# Altium PCB L_radar_some_PCBs.PcbDoc (part 2 of 3)
Units mm, origin at the board's own origin, x right, y up, seen from the top; angles counter-clockwise.
Board outline 152.4 x 101.6 mm, 8 copper layers (Top Layer, Layer 5, Layer 3, Layer 1, Layer 2, Layer 4, Layer 6, Bottom Layer), stack 1.028 mm thick; 12 components, 0 nets, 0 pads, 2735 vias.
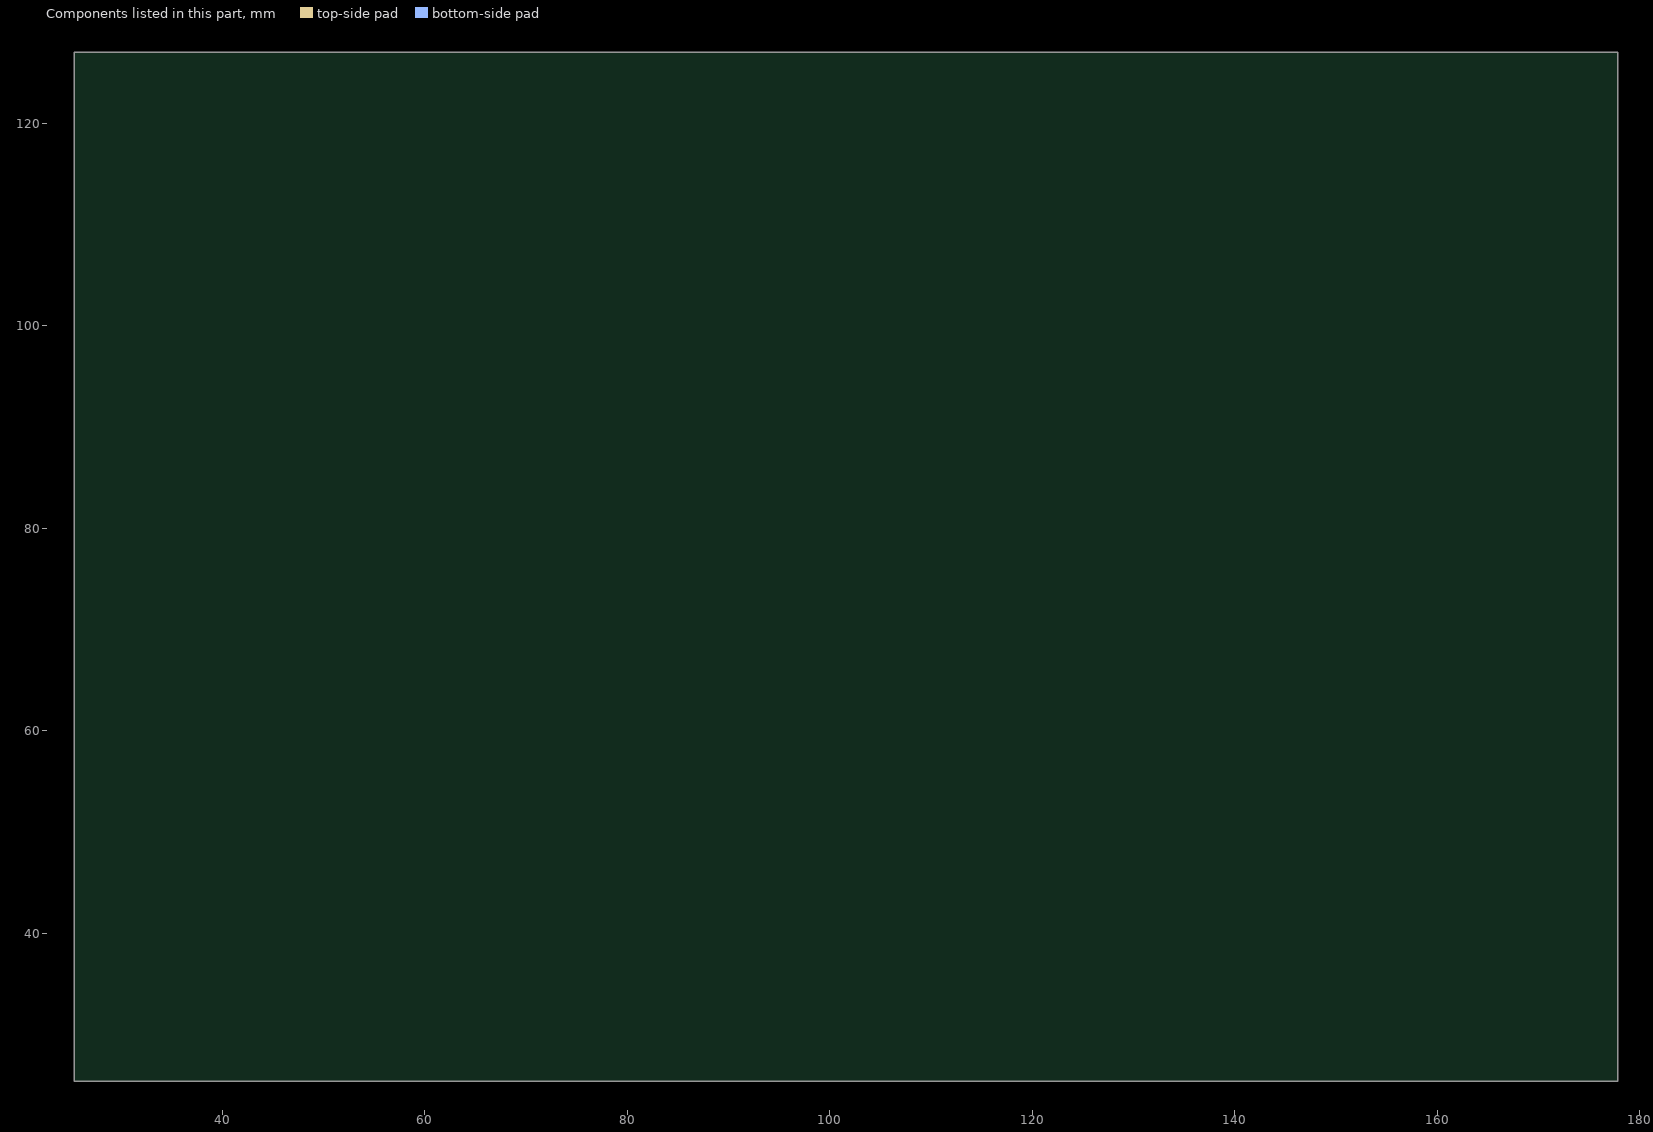
[diagram p8: the components of this part, seen from the top]

## Via types
v1: diameter 0.3, hole 0.2, Top Layer to Bottom Layer, tented both sides, 2691 vias
v2: diameter 2.5, hole 2.2, Top Layer to Bottom Layer, tented both sides, 24 vias
v3: diameter 0.3, hole 0.2, Layer 6 to Bottom Layer, tented both sides, 18 vias
v4: diameter 0.3, hole 0.2, Layer 2 to Bottom Layer, tented both sides, 2 vias

## Nets (pads, with @x,y where several pads share a name; then routed paths per layer and width w, separated by ;. In a path a pad name is that pad's centre, name@x,y a point inside that pad or via, vN(x,y) a via of type N, cw(c..) or ccw(c..) an arc to the next point about the centre after c; other vN are vias at no path point)
copper on no net: | length 359
  Layer 2 w0.15: v4(121.312,96.988) v4(169.312,96.988)
  Layer 6 w0.2: v3(145.312,72.988) v3(145.312,120.988)
  Bottom Layer w0.2: 33.528,76.322 33.528,73.185 33.645,73.068 102.575,73.068 102.692,73.185 102.692,77.27 ; 33.528,86.322 33.528,90.134 33.645,90.251 40.178,90.251 102.575,90.251 102.692,90.134 102.692,87.018 ; 45.412,108.87 45.412,104.978 93.412,104.978 93.412,108.87 ; 45.412,118.87 45.412,122.161 93.412,122.161 93.412,118.87
  other v1: 138.432,72.293 138.83,72.293 139.228,72.293 139.626,72.293 140.024,72.293 140.422,72.293 140.82,72.293 141.218,72.293 141.616,72.293 142.014,72.293 142.412,72.293 142.81,72.293 143.208,72.293 143.606,72.293 144.004,72.293 144.402,72.293 144.812,72.288 145.811,72.288 146.224,72.278 146.622,72.278 147.02,72.278 147.418,72.278 147.816,72.278 148.214,72.278 148.612,72.278 149.01,72.278 149.408,72.278 149.806,72.278 150.204,72.278 150.602,72.278 151,72.278 151.398,72.278 151.796,72.278 152.194,72.278 138.432,72.679 138.83,72.679 139.228,72.679 139.626,72.679 140.024,72.679 140.422,72.679 140.82,72.679 141.218,72.679 141.616,72.679 142.014,72.679 142.412,72.679 142.81,72.679 143.208,72.679 143.606,72.679 144.004,72.679 144.402,72.679 144.812,72.686 145.812,72.686 146.225,72.699 146.623,72.699 147.021,72.699 147.419,72.699 147.817,72.699 148.215,72.699 148.613,72.699 149.011,72.699 149.409,72.699 149.807,72.699 150.205,72.699 150.603,72.699 151.001,72.699 151.399,72.699 151.797,72.699 152.195,72.699 138.453,73.034 152.321,73.034 144.812,73.084 145.812,73.084 138.453,73.432 152.321,73.432 35.381,73.482 35.779,73.482 36.177,73.482 36.575,73.482 36.973,73.482 37.371,73.482 37.769,73.482 38.167,73.482 38.565,73.482 38.963,73.482 39.361,73.482 39.759,73.482 40.157,73.482 40.555,73.482 40.953,73.482 41.351,73.482 41.745,73.49 42.745,73.49 87.209,73.495 87.607,73.495 88.005,73.495 88.403,73.495 88.801,73.495 89.199,73.495 89.597,73.495 89.995,73.495 90.393,73.495 90.791,73.495 91.189,73.495 91.587,73.495 91.985,73.495 92.383,73.495 92.781,73.495 93.179,73.495 93.558,73.49 94.558,73.49 144.812,73.482 145.812,73.482 43.117,73.496 43.515,73.496 43.913,73.496 44.311,73.496 44.709,73.496 45.107,73.496 45.505,73.496 45.903,73.496 46.301,73.496 46.699,73.496 47.097,73.496 47.495,73.496 47.893,73.496 48.291,73.496 48.689,73.496 49.087,73.496 94.976,73.51 95.374,73.51 95.772,73.51 96.17,73.51 96.568,73.51 96.966,73.51 97.364,73.51 97.762,73.51 98.16,73.51 98.558,73.51 98.956,73.51 99.354,73.51 99.752,73.51 100.15,73.51 100.548,73.51 100.946,73.51 138.453,73.83 152.321,73.83 43.106,73.864 43.504,73.864 43.902,73.864 44.3,73.864 44.698,73.864 45.096,73.864 45.494,73.864 45.892,73.864 46.29,73.864 46.688,73.864 47.086,73.864 47.484,73.864 47.882,73.864 48.28,73.864 48.678,73.864 49.076,73.864 41.745,73.89 42.745,73.89 87.211,73.901 87.609,73.901 88.007,73.901 88.405,73.901 88.803,73.901 89.201,73.901 89.599,73.901 89.997,73.901 90.395,73.901 90.793,73.901 91.191,73.901 91.589,73.901 91.987,73.901 92.385,73.901 92.783,73.901 93.181,73.901 93.558,73.89 94.558,73.89 94.976,73.883 95.374,73.883 95.772,73.883 96.17,73.883 96.568,73.883 96.966,73.883 97.364,73.883 97.762,73.883 98.16,73.883 98.558,73.883 98.956,73.883 99.354,73.883 99.752,73.883 100.15,73.883 100.548,73.883 100.946,73.883 144.812,73.88 145.812,73.88 35.378,73.903 35.776,73.903 36.174,73.903 36.572,73.903 36.97,73.903 37.368,73.903 37.766,73.903 38.164,73.903 38.562,73.903 38.96,73.903 39.358,73.903 39.756,73.903 40.154,73.903 40.552,73.903 40.95,73.903 41.348,73.903 138.453,74.228 152.321,74.228 49.072,74.232 100.914,74.232 35.395,74.27 87.211,74.257 144.812,74.278 145.812,74.278 41.745,74.29 42.745,74.29 93.558,74.29 94.558,74.29 49.072,74.63 100.914,74.63 138.453,74.626 152.321,74.626 87.211,74.655 35.395,74.668 144.812,74.676 145.812,74.676 41.745,74.69 42.745,74.69 93.558,74.69 94.558,74.69 49.072,75.028 100.914,75.028 138.453,75.024 152.321,75.024 35.395,75.066 87.211,75.053 41.745,75.09 42.745,75.09 93.558,75.09 94.558,75.09 144.812,75.074 145.812,75.074 138.453,75.422 152.321,75.422 49.072,75.426 100.914,75.426 35.395,75.464 87.211,75.451 144.812,75.472 145.812,75.472 41.745,75.49 42.745,75.49 93.558,75.49 94.558,75.49 49.072,75.824 100.914,75.824 138.453,75.82 152.321,75.82 87.211,75.849 35.395,75.862 144.812,75.87 145.812,75.87 41.745,75.89 42.745,75.89 93.558,75.89 94.558,75.89 49.072,76.222 100.914,76.222 138.453,76.218 152.321,76.218 35.395,76.26 87.211,76.247 144.812,76.268 145.812,76.268 41.745,76.29 42.745,76.29 93.558,76.29 94.558,76.29 138.453,76.616 152.321,76.616 49.072,76.62 100.914,76.62 35.395,76.658 87.211,76.645 144.812,76.666 145.812,76.666 41.745,76.69 42.745,76.69 93.558,76.69 94.558,76.69 49.072,77.018 100.914,77.018 138.453,77.014 152.321,77.014 87.211,77.043 35.395,77.056 144.812,77.064 145.812,77.064 41.745,77.09 42.745,77.09 93.558,77.09 94.558,77.09 49.072,77.416 100.914,77.416 138.453,77.412 152.321,77.412 35.395,77.454 87.211,77.441 144.812,77.462 145.812,77.462 41.745,77.49 42.745,77.49 93.558,77.49 94.558,77.49 138.453,77.81 152.321,77.81 49.072,77.814 100.914,77.814 35.395,77.852 87.211,77.839 144.812,77.86 145.812,77.86 41.745,77.89 42.745,77.89 93.558,77.89 94.558,77.891 138.793,78.09 139.191,78.09 139.589,78.09 139.987,78.09 140.385,78.09 140.783,78.09 141.181,78.09 141.579,78.09 141.977,78.09 142.375,78.09 142.773,78.09 143.171,78.09 143.569,78.09 143.967,78.09 144.365,78.09 146.211,78.07 146.609,78.07 147.007,78.07 147.405,78.07 147.803,78.07 148.201,78.07 148.599,78.07 148.997,78.07 149.395,78.07 149.793,78.07 150.191,78.07 150.589,78.07 150.987,78.07 151.385,78.07 151.783,78.07 152.181,78.07 49.072,78.212 100.914,78.212 87.211,78.237 35.395,78.25 144.812,78.258 145.812,78.258 41.745,78.29 42.745,78.29 93.558,78.29 94.558,78.29 49.072,78.61 100.914,78.61 35.395,78.648 87.211,78.635 144.812,78.656 145.812,78.656 41.745,78.69 42.745,78.69 93.558,78.69 94.558,78.69 49.072,79.008 100.914,79.008 35.395,79.046 87.211,79.033 144.812,79.054 145.812,79.054 41.745,79.09 42.745,79.09 93.558,79.09 94.558,79.091 35.829,79.387 36.227,79.387 36.625,79.387 37.023,79.387 37.421,79.387 37.819,79.387 38.217,79.387 38.615,79.387 39.013,79.387 39.411,79.387 39.809,79.387 40.207,79.387 40.605,79.387 41.003,79.387 41.401,79.387 43.092,79.375 43.49,79.375 43.888,79.375 44.286,79.375 44.684,79.375 45.082,79.375 45.48,79.375 45.878,79.375 46.276,79.375 46.674,79.375 47.072,79.375 47.47,79.375 47.868,79.375 48.266,79.375 48.664,79.375 49.072,79.406 100.914,79.406 87.211,79.431 35.395,79.444 87.569,79.451 87.967,79.451 88.365,79.451 88.763,79.451 89.161,79.451 89.559,79.451 89.957,79.451 90.355,79.451 90.753,79.451 91.151,79.451 91.549,79.451 91.947,79.451 92.345,79.451 92.743,79.451 93.141,79.451 144.812,79.452 145.812,79.452 94.958,79.477 95.356,79.477 95.754,79.477 96.152,79.477 96.55,79.477 96.948,79.477 97.346,79.477 97.744,79.477 98.142,79.477 98.54,79.477 98.938,79.477 99.336,79.477 99.734,79.477 100.132,79.477 100.53,79.477 41.745,79.49 42.745,79.49 93.558,79.49 94.558,79.49 144.812,79.85 145.812,79.85 41.745,79.89 42.745,79.89 93.558,79.89 94.558,79.89 144.812,80.248 145.812,80.248 41.745,80.29 42.745,80.29 93.558,80.29 94.558,80.291 144.812,80.646 145.812,80.646 41.745,80.69 42.745,80.69 93.558,80.69 94.558,80.69 42.655,80.89 93.648,80.89 144.812,81.044 145.812,81.044 41.745,81.09 94.558,81.09 42.915,81.22 43.315,81.22 43.715,81.22 44.115,81.22 92.188,81.22 92.588,81.22 92.988,81.22 93.388,81.22 144.812,81.442 145.812,81.442 41.745,81.49 94.558,81.49 44.515,81.525 91.788,81.525 44.915,81.59 45.315,81.59 45.642,81.59 46.042,81.59 46.442,81.59 46.842,81.59 47.242,81.59 47.642,81.59 48.042,81.59 48.442,81.59 48.842,81.59 49.242,81.59 49.642,81.59 50.042,81.59 50.442,81.59 50.842,81.59 51.242,81.59 51.642,81.59 52.042,81.59 52.442,81.59 52.842,81.59 53.242,81.59 53.642,81.59 54.042,81.59 54.442,81.59 54.842,81.59 55.242,81.59 55.642,81.59 56.042,81.59 56.442,81.59 56.842,81.59 57.242,81.59 57.642,81.59 58.042,81.59 58.442,81.59 58.842,81.59 59.242,81.59 59.642,81.59 60.042,81.59 60.442,81.59 60.842,81.59 61.242,81.59 61.642,81.59 62.042,81.59 62.442,81.59 62.842,81.59 63.242,81.59 63.642,81.59 64.042,81.59 64.442,81.59 64.842,81.59 65.242,81.59 65.642,81.59 66.042,81.59 66.442,81.59 66.842,81.59 67.242,81.59 67.642,81.59 68.042,81.59 68.442,81.59 68.842,81.59 69.242,81.59 69.642,81.59 70.042,81.59 70.442,81.59 70.842,81.59 71.242,81.59 71.642,81.59 72.042,81.59 72.442,81.59 72.842,81.59 73.242,81.59 73.642,81.59 74.042,81.59 74.442,81.59 74.842,81.59 75.242,81.59 75.642,81.59 76.042,81.59 76.442,81.59 76.842,81.59 77.242,81.59 77.642,81.59 78.042,81.59 78.442,81.59 78.842,81.59 79.242,81.59 79.642,81.59 80.042,81.59 80.442,81.59 80.842,81.59 81.242,81.59 81.642,81.59 82.042,81.59 82.442,81.59 82.842,81.59 83.242,81.59 83.642,81.59 84.042,81.59 84.442,81.59 84.842,81.59 85.242,81.59 85.642,81.59 86.042,81.59 86.442,81.59 86.842,81.59 87.242,81.59 87.642,81.59 88.042,81.59 88.442,81.59 88.842,81.59 89.242,81.59 89.642,81.59 90.042,81.59 90.442,81.59 90.988,81.59 91.388,81.59 144.812,81.84 145.812,81.84 41.745,81.89 94.558,81.89 42.915,82.09 43.315,82.09 92.988,82.09 93.388,82.09 144.812,82.238 145.812,82.238 41.745,82.29 94.558,82.29 44.915,82.59 45.315,82.59 45.642,82.59 46.042,82.59 46.442,82.59 46.842,82.59 47.242,82.59 47.642,82.59 48.042,82.59 48.442,82.59 48.842,82.59 49.242,82.59 49.642,82.59 50.042,82.59 50.442,82.59 50.842,82.59 51.242,82.59 51.642,82.59 52.042,82.59 52.442,82.59 52.842,82.59 53.242,82.59 53.642,82.59 54.042,82.59 54.442,82.59 54.842,82.59 55.242,82.59 55.642,82.59 56.042,82.59 56.442,82.59 56.842,82.59 57.242,82.59 57.642,82.59 58.042,82.59 58.442,82.59 58.842,82.59 59.242,82.59 59.642,82.59 60.042,82.59 60.442,82.59 60.842,82.59 61.242,82.59 61.642,82.59 62.042,82.59 62.442,82.59 62.842,82.59 63.242,82.59 63.642,82.59 64.042,82.59 64.442,82.59 64.842,82.59 65.242,82.59 65.642,82.59 66.042,82.59 66.442,82.59 66.842,82.59 67.242,82.59 70.042,82.59 70.442,82.59 70.842,82.59 71.242,82.59 71.642,82.59 72.042,82.59 72.442,82.59 72.842,82.59 73.242,82.59 73.642,82.59 74.042,82.59 74.442,82.59 74.842,82.59 75.242,82.59 75.642,82.59 76.042,82.59 76.442,82.59 76.842,82.59 77.242,82.59 77.642,82.59 78.042,82.59 78.442,82.59 78.842,82.59 79.242,82.59 79.642,82.59 80.042,82.59 80.442,82.59 80.842,82.59 81.242,82.59 81.642,82.59 82.042,82.59 82.442,82.59 82.842,82.59 83.242,82.59 83.642,82.59 84.042,82.59 84.442,82.59 84.842,82.59 85.242,82.59 85.642,82.59 86.042,82.59 86.442,82.59 86.842,82.59 87.242,82.59 87.642,82.59 88.042,82.59 88.442,82.59 88.842,82.59 89.242,82.59 89.642,82.59 90.042,82.59 90.442,82.59 90.988,82.59 91.388,82.59 144.812,82.636 145.812,82.636 44.515,82.655 91.788,82.655 41.745,82.69 94.558,82.69 67.772,82.76 68.642,82.76 69.512,82.76 42.915,82.96 43.315,82.96 43.715,82.96 44.115,82.96 92.188,82.96 92.588,82.96 92.988,82.96 93.388,82.96 144.812,83.034 145.812,83.034 41.745,83.09 94.558,83.09 67.772,83.16 68.642,83.16 69.512,83.16 144.812,83.432 145.812,83.432 41.745,83.49 42.745,83.49 93.558,83.49 94.558,83.49 67.772,83.56 69.512,83.56 144.812,83.83 145.812,83.83 87.607,83.87 88.005,83.87 88.403,83.87 88.801,83.87 89.199,83.87 89.597,83.87 89.995,83.87 90.393,83.87 90.791,83.87 91.189,83.87 91.587,83.87 91.985,83.87 92.383,83.87 92.781,83.87 93.179,83.87 35.7,83.884 36.098,83.884 36.496,83.884 36.894,83.884 37.292,83.884 37.69,83.884 38.088,83.884 38.486,83.884 38.884,83.884 39.282,83.884 39.68,83.884 40.078,83.884 40.476,83.884 40.874,83.884 41.272,83.884 41.745,83.89 42.745,83.89 93.558,83.89 94.558,83.89 43.183,83.921 43.581,83.921 43.979,83.921 44.377,83.921 44.775,83.921 45.173,83.921 45.571,83.921 45.969,83.921 46.367,83.921 46.765,83.921 47.163,83.921 47.561,83.921 47.959,83.921 48.357,83.921 48.755,83.921 87.199,83.929 35.36,83.943 94.942,83.944 95.34,83.944 95.738,83.944 96.136,83.944 96.534,83.944 96.932,83.944 97.33,83.944 97.728,83.944 98.126,83.944 98.524,83.944 98.922,83.944 99.32,83.944 99.718,83.944 100.116,83.944 100.514,83.944 100.915,83.954 49.111,83.967 67.772,83.96 69.512,83.96 61.783,84.015 62.129,84.011 62.527,84.011 62.925,84.011 63.323,84.011 63.721,84.011 64.119,84.011 64.517,84.011 64.915,84.011 65.313,84.011 65.711,84.011 66.109,84.011 66.507,84.011 66.905,84.011 67.303,84.011 69.984,84.023 70.382,84.023 70.78,84.023 71.178,84.023 71.576,84.023 71.974,84.023 72.372,84.023 72.77,84.023 73.168,84.023 73.566,84.023 73.964,84.023 74.362,84.023 74.76,84.023 75.158,84.023 75.476,84.056 144.812,84.228 145.812,84.228 41.745,84.29 42.745,84.29 93.558,84.29 94.558,84.29 87.199,84.327 35.36,84.341 49.111,84.365 68.077,84.36 69.207,84.36 100.915,84.352 61.783,84.413 75.476,84.454 144.812,84.626 145.812,84.626 41.745,84.69 42.745,84.69 93.558,84.69 94.558,84.69 35.36,84.739 87.199,84.725 49.111,84.763 68.142,84.76 69.142,84.76 100.915,84.75 61.783,84.811 75.476,84.852 144.812,85.024 145.812,85.024 41.745,85.09 42.745,85.09 93.558,85.09 94.558,85.09 87.199,85.123 35.36,85.137 100.915,85.148 49.111,85.161 68.142,85.16 69.142,85.16 61.783,85.209 75.476,85.25 144.812,85.422 145.812,85.422 41.745,85.49 42.745,85.49 93.558,85.49 94.558,85.49 87.199,85.521 35.36,85.535 49.111,85.559 100.915,85.546 68.142,85.56 69.142,85.56 61.783,85.607 75.476,85.648 144.812,85.82 145.812,85.82 41.745,85.89 42.745,85.89 93.558,85.89 94.558,85.89 35.36,85.933 87.199,85.919 49.111,85.957 68.142,85.96 69.142,85.96 100.915,85.944 61.783,86.005 75.476,86.046 144.812,86.218 145.812,86.218 41.745,86.29 42.745,86.29 93.558,86.29 94.558,86.29 87.199,86.317 35.36,86.331 100.915,86.342 49.111,86.355 68.142,86.36 69.142,86.36 61.783,86.403 75.476,86.444 144.812,86.616 145.812,86.616 41.745,86.69 42.745,86.69 93.558,86.69 94.558,86.69 87.199,86.715 35.36,86.729 49.111,86.753 100.915,86.74 68.142,86.76 69.142,86.76 61.783,86.801 75.476,86.842 144.812,87.014 145.812,87.014 41.745,87.09 42.745,87.09 93.558,87.09 94.558,87.09 35.36,87.127 87.199,87.113 49.111,87.151 68.142,87.16 69.142,87.16 100.915,87.138 61.783,87.199 75.476,87.24 144.812,87.412 145.812,87.412 41.745,87.49 42.745,87.49 93.558,87.49 94.558,87.49 87.199,87.511 35.36,87.525 100.915,87.536 49.111,87.549 68.142,87.56 69.142,87.56 61.783,87.597 75.476,87.638 144.812,87.81 145.812,87.81 41.745,87.89 42.745,87.89 93.558,87.89 94.558,87.89 87.199,87.909 35.36,87.923 49.111,87.947 100.915,87.934 68.142,87.96 69.142,87.96 61.783,87.995 75.476,88.036 144.812,88.208 145.812,88.208 41.745,88.29 42.745,88.29 93.558,88.29 94.558,88.29 35.36,88.321 87.199,88.307 49.111,88.345 100.915,88.332 68.142,88.36 69.142,88.36 61.783,88.393 75.476,88.434 144.812,88.606 145.812,88.606 41.745,88.69 42.745,88.69 87.199,88.705 93.558,88.69 94.558,88.69 35.36,88.719 100.915,88.73 49.111,88.743 68.142,88.76 69.142,88.76 61.783,88.791 75.476,88.832 144.812,89.004 145.812,89.004 41.745,89.09 42.745,89.09 87.199,89.103 93.558,89.091 94.558,89.091 35.36,89.117 49.111,89.141 100.915,89.128 68.142,89.16 69.142,89.16 61.783,89.189 75.476,89.23 144.812,89.402 145.812,89.402 41.745,89.49 42.745,89.49 87.202,89.488 87.6,89.488 87.998,89.488 88.396,89.488 88.794,89.488 89.192,89.488 89.59,89.488 89.988,89.488 90.386,89.488 90.784,89.488 91.182,89.488 91.58,89.488 91.978,89.488 92.376,89.488 92.774,89.488 93.172,89.488 93.558,89.49 94.558,89.49 35.358,89.504 35.756,89.504 36.154,89.504 36.552,89.504 36.95,89.504 37.348,89.504 37.746,89.504 38.144,89.504 38.542,89.504 38.94,89.504 39.338,89.504 39.736,89.504 40.134,89.504 40.532,89.504 40.93,89.504 41.328,89.504 43.143,89.515 43.541,89.515 43.939,89.515 44.337,89.515 44.735,89.515 45.133,89.515 45.531,89.515 45.929,89.515 46.327,89.515 46.725,89.515 47.123,89.515 47.521,89.515 47.919,89.515 48.317,89.515 48.715,89.515 49.113,89.515 94.931,89.508 95.329,89.508 95.727,89.508 96.125,89.508 96.523,89.508 96.921,89.508 97.319,89.508 97.717,89.508 98.115,89.508 98.513,89.508 98.911,89.508 99.309,89.508 99.707,89.508 100.105,89.508 100.503,89.508 100.901,89.508 61.774,89.569 62.172,89.569 62.57,89.569 62.968,89.569 63.366,89.569 63.764,89.569 64.162,89.569 64.56,89.569 64.958,89.569 65.356,89.569 65.754,89.569 66.152,89.569 66.55,89.569 66.948,89.569 67.346,89.569 67.744,89.569 68.142,89.56 69.142,89.56 69.492,89.57 69.89,89.57 70.288,89.57 70.686,89.57 71.084,89.57 71.482,89.57 71.88,89.57 72.278,89.57 72.676,89.57 73.074,89.57 73.472,89.57 73.87,89.57 74.268,89.57 74.666,89.57 75.064,89.57 75.462,89.57 144.812,89.8 145.812,89.8 42.746,89.902 87.197,89.903 87.595,89.903 87.993,89.903 88.391,89.903 88.789,89.903 89.187,89.903 89.585,89.903 89.983,89.903 90.381,89.903 90.779,89.903 91.177,89.903 91.575,89.903 91.973,89.903 92.371,89.903 92.769,89.903 93.167,89.903 93.557,89.903 94.949,89.901 95.347,89.901 95.745,89.901 96.143,89.901 96.541,89.901 96.939,89.901 97.337,89.901 97.735,89.901 98.133,89.901 98.531,89.901 98.929,89.901 99.327,89.901 99.725,89.901 100.123,89.901 100.521,89.901 100.919,89.901 35.382,89.91 35.78,89.91 36.178,89.91 36.576,89.91 36.974,89.91 37.372,89.91 37.77,89.91 38.168,89.91 38.566,89.91 38.964,89.91 39.362,89.91 39.76,89.91 40.158,89.91 40.556,89.91 40.954,89.91 41.352,89.91 41.745,89.903 43.159,89.913 43.557,89.913 43.955,89.913 44.353,89.913 44.751,89.913 45.149,89.913 45.547,89.913 45.945,89.913 46.343,89.913 46.741,89.913 47.139,89.913 47.537,89.913 47.935,89.913 48.333,89.913 48.731,89.913 49.129,89.913 94.558,89.903 69.5,89.94 69.898,89.94 70.296,89.94 70.694,89.94 71.092,89.94 71.49,89.94 71.888,89.94 72.286,89.94 72.684,89.94 73.082,89.94 73.48,89.94 73.878,89.94 74.276,89.94 74.674,89.94 75.072,89.94 75.47,89.94 61.784,89.966 62.182,89.966 62.58,89.966 62.978,89.966 63.376,89.966 63.774,89.966 64.172,89.966 64.57,89.966 64.968,89.966 65.366,89.966 65.764,89.966 66.162,89.966 66.56,89.966 66.958,89.966 67.356,89.966 67.754,89.966 68.142,89.96 69.142,89.96 169.624,90.071 164.134,90.085 164.532,90.085 164.93,90.085 165.328,90.085 165.726,90.085 166.124,90.085 166.522,90.085 166.92,90.085 167.318,90.085 167.716,90.085 168.114,90.085 168.512,90.085 168.91,90.085 169.308,90.085 170.016,90.088 120.624,90.12 121.015,90.115 121.413,90.115 121.811,90.115 122.209,90.115 122.607,90.115 123.005,90.115 123.403,90.115 123.801,90.115 124.199,90.115 124.597,90.115 124.995,90.115 125.393,90.115 125.791,90.115 126.189,90.115 126.578,90.119 144.812,90.198 145.812,90.198 169.624,90.469 170.016,90.486 120.624,90.518 121.021,90.533 126.578,90.517 163.917,90.53 144.812,90.596 145.812,90.596 169.624,90.867 170.016,90.884 120.624,90.916 126.578,90.915 121.021,90.931 163.917,90.928 144.812,90.994 145.812,90.994 169.624,91.265 170.016,91.282 120.624,91.314 126.578,91.313 121.021,91.329 163.917,91.326 144.812,91.392 145.812,91.392 169.624,91.663 170.016,91.68 120.624,91.712 121.021,91.727 126.578,91.711 163.917,91.724 144.812,91.79 145.812,91.79 169.624,92.061 170.016,92.078 120.624,92.11 126.578,92.109 121.021,92.125 163.917,92.122 144.812,92.188 145.812,92.188 169.624,92.459 170.016,92.476 120.624,92.508 126.578,92.507 121.021,92.523 163.917,92.52 144.812,92.586 145.812,92.586 169.624,92.857 170.016,92.874 120.624,92.906 121.021,92.921 126.578,92.905 163.917,92.918 144.812,92.984 145.812,92.984 169.624,93.255 170.016,93.272 120.624,93.304 126.578,93.303 121.021,93.319 163.917,93.316 144.812,93.382 145.812,93.382 169.624,93.653 170.016,93.67 120.624,93.702 126.578,93.701 121.021,93.717 163.917,93.714 144.812,93.78 145.812,93.78 169.624,94.051 170.016,94.068 120.624,94.1 121.021,94.115 126.578,94.099 163.917,94.112 144.812,94.178 145.812,94.178 169.624,94.449 170.016,94.466 120.624,94.498 126.578,94.497 121.021,94.513 163.917,94.51 144.812,94.576 145.812,94.576 169.624,94.847 170.016,94.864 120.624,94.896 126.578,94.895 121.021,94.911 163.917,94.908 144.812,94.974 145.812,94.974 169.624,95.245 170.016,95.262 120.624,95.294 121.021,95.309 126.578,95.293 163.917,95.306 144.812,95.372 145.812,95.372 169.624,95.643 170.016,95.66 120.624,95.692 126.578,95.691 121.021,95.707 163.917,95.704 144.812,95.77 145.812,95.77 169.624,96.041 170.016,96.058 120.624,96.09 126.578,96.089 121.021,96.105 163.917,96.102 144.812,96.168 145.812,96.168 120.612,96.488 121.009,96.488 121.407,96.488 121.806,96.488 122.204,96.488 122.602,96.488 123,96.488 123.398,96.488 123.796,96.488 124.194,96.488 124.592,96.488 124.99,96.488 125.388,96.488 125.786,96.488 126.184,96.488 126.582,96.488 126.98,96.488 127.378,96.488 127.776,96.488 128.174,96.488 128.572,96.488 128.97,96.488 129.368,96.488 129.766,96.488 130.165,96.497 130.562,96.488 130.96,96.488 131.358,96.488 131.756,96.488 132.154,96.488 132.552,96.488 132.95,96.488 133.348,96.488 133.746,96.488 134.144,96.488 134.542,96.488 134.94,96.488 135.338,96.488 135.736,96.488 136.134,96.488 136.532,96.488 136.93,96.488 137.328,96.488 137.726,96.488 138.124,96.488 138.522,96.488 138.92,96.488 139.318,96.488 139.716,96.488 140.114,96.488 140.512,96.488 140.91,96.488 141.308,96.488 141.706,96.488 142.104,96.488 142.502,96.488 142.9,96.488 143.298,96.488 143.696,96.488 144.094,96.488 144.492,96.488 146.132,96.488 146.53,96.488 146.928,96.488 147.326,96.488 147.724,96.488 148.122,96.488 148.52,96.488 148.918,96.488 149.316,96.488 149.714,96.488 150.112,96.488 150.51,96.488 150.908,96.488 151.306,96.488 151.704,96.488 152.102,96.488 152.5,96.488 152.898,96.488 153.296,96.488 153.694,96.488 154.092,96.488 154.49,96.488 154.888,96.488 155.286,96.488 155.684,96.488 156.082,96.488 156.48,96.488 156.878,96.488 157.276,96.488 157.674,96.488 158.072,96.488 158.47,96.488 158.868,96.488 159.266,96.488 159.664,96.488 160.062,96.488 160.46,96.488 160.858,96.488 161.256,96.488 161.654,96.488 162.052,96.488 162.45,96.488 162.848,96.488 163.246,96.488 163.644,96.488 164.042,96.488 164.44,96.488 164.838,96.488 165.236,96.488 165.634,96.488 166.032,96.488 166.43,96.488 166.828,96.488 167.226,96.488 167.624,96.488 168.022,96.488 168.42,96.488 168.818,96.488 169.216,96.488 169.614,96.488 170.011,96.488 120.612,97.488 121.009,97.488 121.407,97.488 121.806,97.488 122.204,97.488 122.602,97.488 123,97.488 123.398,97.488 123.796,97.488 124.194,97.488 124.592,97.488 124.99,97.488 125.388,97.488 125.786,97.488 126.184,97.488 126.582,97.488 126.98,97.488 127.378,97.488 127.776,97.488 128.174,97.488 128.572,97.488 128.97,97.488 129.368,97.488 129.766,97.488 130.163,97.488 130.562,97.488 130.96,97.488 131.358,97.488 131.756,97.488 132.154,97.488 132.552,97.488 132.95,97.488 133.348,97.488 133.746,97.488 134.144,97.488 134.542,97.488 134.94,97.488 135.338,97.488 135.736,97.488 136.134,97.488 136.532,97.488 136.93,97.488 137.328,97.488 137.726,97.488 138.124,97.488 138.522,97.488 138.92,97.488 139.318,97.488 139.716,97.488 140.114,97.488 140.512,97.488 140.91,97.488 141.308,97.488 141.706,97.488 142.104,97.488 142.502,97.488 142.9,97.488 143.298,97.488 143.696,97.488 144.094,97.488 144.492,97.488 146.132,97.488 146.53,97.488 146.928,97.488 147.326,97.488 147.724,97.488 148.122,97.488 148.52,97.488 148.918,97.488 149.316,97.488 149.714,97.488 150.112,97.488 150.51,97.488 150.908,97.488 151.306,97.488 151.704,97.488 152.102,97.488 152.5,97.488 152.898,97.488 153.296,97.488 153.694,97.488 154.092,97.488 154.49,97.488 154.888,97.488 155.286,97.488 155.684,97.488 156.082,97.488 156.48,97.488 156.878,97.488 157.276,97.488 157.674,97.488 158.072,97.488 158.47,97.488 158.868,97.488 159.266,97.488 159.664,97.488 160.062,97.488 160.46,97.488 160.858,97.488 161.256,97.488 162.052,97.488 162.45,97.488 162.848,97.488 163.246,97.488 163.644,97.488 164.042,97.488 164.44,97.488 164.838,97.488 165.236,97.488 165.634,97.488 166.032,97.488 166.43,97.488 166.828,97.488 167.226,97.488 167.624,97.488 168.022,97.488 168.42,97.488 168.818,97.488 169.216,97.488 169.614,97.488 170.012,97.488 161.651,97.503 145.812,97.808 126.566,97.849 144.817,97.831 121.024,97.875 163.916,97.862 120.614,97.885 169.593,97.9 169.997,97.899 145.812,98.207 144.817,98.229 126.566,98.247 120.614,98.283 121.024,98.273 163.916,98.26 169.593,98.298 169.997,98.297 145.812,98.605 144.817,98.627 126.566,98.645 163.916,98.658 120.614,98.681 121.024,98.671 169.593,98.696 169.997,98.695 145.812,99.003 126.566,99.043 144.817,99.025 121.024,99.069 163.916,99.056 120.614,99.079 169.593,99.094 169.997,99.093 145.812,99.401 144.817,99.423 126.566,99.441 120.614,99.477 121.024,99.467 163.916,99.454 169.593,99.492 169.997,99.491 145.812,99.799 144.817,99.821 126.566,99.839 163.916,99.852 120.614,99.875 121.024,99.865 169.593,99.89 169.997,99.889 145.812,100.197 126.566,100.237 144.817,100.219 121.024,100.263 163.916,100.25 120.614,100.273 169.593,100.288 169.997,100.287 145.812,100.595 144.817,100.617 126.566,100.635 120.614,100.671 121.024,100.661 163.916,100.648 169.593,100.686 169.997,100.685 145.812,100.993 144.817,101.015 126.566,101.033 163.916,101.046 120.614,101.069 121.024,101.059 169.593,101.084 169.997,101.083 145.812,101.391 126.566,101.431 144.817,101.413 121.024,101.457 163.916,101.444 120.614,101.467 169.593,101.482 169.997,101.481 145.812,101.789 144.817,101.811 126.566,101.829 120.614,101.865 121.024,101.855 163.916,101.842 169.593,101.88 169.997,101.879 145.812,102.187 144.817,102.209 126.566,102.227 163.916,102.24 120.614,102.263 121.024,102.253 169.593,102.278 169.997,102.277 145.812,102.585 126.566,102.625 144.817,102.607 121.024,102.651 163.916,102.638 120.614,102.661 169.593,102.676 169.997,102.675 145.812,102.983 144.817,103.005 126.566,103.023 120.614,103.059 121.024,103.049 163.916,103.036 169.593,103.074 169.997,103.073 145.812,103.381 144.817,103.403 126.566,103.421 163.916,103.434 120.614,103.457 121.024,103.447 169.593,103.472 169.997,103.471 145.812,103.779 144.817,103.801 121.024,103.845 163.942,103.845 120.614,103.855 121.014,103.851 121.412,103.851 121.81,103.851 122.208,103.851 122.606,103.851 123.004,103.851 123.402,103.851 123.8,103.851 124.198,103.851 124.596,103.851 124.994,103.851 125.392,103.851 125.79,103.851 126.188,103.851 126.586,103.851 164.392,103.858 164.79,103.858 165.188,103.858 165.586,103.858 165.984,103.858 166.382,103.858 166.78,103.858 167.178,103.858 167.576,103.858 167.974,103.858 168.372,103.858 168.77,103.858 169.168,103.858 169.593,103.87 169.997,103.869 145.812,104.177 144.817,104.199 145.812,104.575 144.817,104.597 145.812,104.973 144.817,104.995 145.812,105.371 144.817,105.393 145.812,105.769 144.817,105.791 145.812,106.167 144.817,106.189 145.812,106.565 144.817,106.587 145.812,106.963 144.817,106.985 45.606,107.148 46.028,107.147 46.393,107.131 46.791,107.131 47.189,107.131 47.587,107.131 47.985,107.131 48.383,107.131 48.781,107.131 49.179,107.131 49.577,107.131 49.975,107.131 50.373,107.131 50.771,107.131 51.169,107.131 51.567,107.131 87.335,107.147 87.733,107.147 88.131,107.147 88.529,107.147 88.927,107.147 89.325,107.147 89.723,107.147 90.121,107.147 90.519,107.147 90.917,107.147 91.315,107.147 91.713,107.147 92.111,107.147 92.509,107.147 92.805,107.149 93.204,107.149 87.034,107.166 145.812,107.361 144.817,107.383 51.727,107.481 45.606,107.546 46.028,107.545 92.805,107.547 93.204,107.547 87.034,107.564 145.812,107.759 144.817,107.781 51.727,107.879 45.606,107.944 46.028,107.943 87.034,107.962 92.805,107.945 93.204,107.945 145.812,108.157 144.817,108.179 51.727,108.277 45.606,108.342 46.028,108.341 92.805,108.343 93.204,108.343 87.034,108.36 145.812,108.555 144.817,108.577 51.727,108.675 45.606,108.74 46.028,108.739 92.805,108.741 93.204,108.741 87.034,108.758 145.812,108.953 144.817,108.975 51.727,109.073 45.606,109.138 46.028,109.137 87.034,109.156 92.805,109.139 93.204,109.139 145.812,109.351 144.817,109.373 51.727,109.471 45.606,109.536 46.028,109.535 92.805,109.537 93.204,109.537 87.034,109.554 145.812,109.749 144.817,109.771 51.727,109.869 45.606,109.934 46.028,109.933 92.805,109.935 93.204,109.935 87.034,109.952 145.812,110.147 144.817,110.169 51.727,110.267 45.606,110.332 46.028,110.331 87.034,110.35 92.805,110.333 93.204,110.333 145.812,110.545 144.817,110.567 51.727,110.665 45.606,110.73 46.028,110.729 92.805,110.731 93.204,110.731 87.034,110.748 145.812,110.943 144.817,110.965 51.727,111.063 45.606,111.128 46.028,111.127 92.805,111.129 93.204,111.129 87.034,111.146 145.812,111.341 144.817,111.363 51.727,111.461 45.606,111.526 46.028,111.525 92.805,111.527 93.204,111.527 87.034,111.544 145.812,111.739 144.817,111.761 51.727,111.859 45.606,111.924 46.028,111.923 87.034,111.942 92.805,111.925 93.204,111.925 145.812,112.137 144.817,112.159 51.727,112.257 45.606,112.322 46.028,112.321 92.805,112.323 93.204,112.323 87.034,112.34 145.812,112.535 144.817,112.557 51.727,112.655 45.606,112.72 46.028,112.719 92.805,112.721 93.204,112.721 87.034,112.738 145.812,112.933 144.817,112.955 51.727,113.053 45.606,113.118 46.028,113.117 87.034,113.136 92.805,113.119 93.204,113.119 87.33,113.15 87.626,113.165 88.024,113.165 88.422,113.165 88.82,113.165 89.218,113.165 89.616,113.165 90.014,113.165 90.412,113.165 90.81,113.165 91.208,113.165 91.606,113.165 92.004,113.165 92.402,113.165 145.812,113.331 144.817,113.353 46.011,113.5 47.211,113.5 48.411,113.5 62.411,113.5 71.211,113.5 72.411,113.5 73.611,113.5 87.611,113.5 45.612,113.5 46.412,113.5 46.812,113.5 47.612,113.5 48.012,113.5 48.812,113.5 49.212,113.5 49.612,113.5 50.012,113.5 50.412,113.5 50.812,113.5 51.212,113.5 51.612,113.5 52.012,113.5 52.412,113.5 52.812,113.5 53.212,113.5 53.612,113.5 54.012,113.5 54.412,113.5 54.812,113.5 55.212,113.5 55.612,113.5 56.012,113.5 56.412,113.5 56.812,113.5 57.212,113.5 57.612,113.5 58.012,113.5 58.412,113.5 58.812,113.5 59.212,113.5 59.612,113.5 60.012,113.5 60.412,113.5 60.812,113.5 61.212,113.5 61.612,113.5 62.012,113.5 62.812,113.5 63.212,113.5 63.612,113.5 64.012,113.5 64.412,113.5 64.812,113.5 65.212,113.5 65.612,113.5 66.012,113.5 66.412,113.5 66.812,113.5 67.212,113.5 67.612,113.5 68.012,113.5 68.412,113.5 68.812,113.5 69.212,113.5 69.612,113.5 70.012,113.5 70.412,113.5 70.812,113.5 71.612,113.5 72.012,113.5 72.812,113.5 73.212,113.5 74.012,113.5 74.412,113.5 74.812,113.5 75.212,113.5 75.612,113.5 76.012,113.5 76.412,113.5 76.812,113.5 77.212,113.5 77.612,113.5 78.012,113.5 78.412,113.5 78.812,113.5 79.212,113.5 79.612,113.5 80.012,113.5 80.412,113.5 80.812,113.5 81.212,113.5 81.612,113.5 82.012,113.5 82.412,113.5 82.812,113.5 83.212,113.5 83.612,113.5 84.012,113.5 84.412,113.5 84.812,113.5 85.212,113.5 85.612,113.5 86.012,113.5 86.412,113.5 86.812,113.5 87.212,113.5 88.012,113.5 88.412,113.5 88.812,113.5 89.212,113.5 89.612,113.5 90.012,113.5 90.412,113.5 90.812,113.5 91.212,113.5 91.612,113.5 92.012,113.5 92.412,113.5 92.812,113.5 93.212,113.5 144.817,113.751 145.812,113.729 145.812,114.127 144.817,114.149 70.612,114.41 45.612,114.5 46.011,114.5 46.412,114.5 46.812,114.5 47.211,114.5 47.612,114.5 48.012,114.5 48.411,114.5 48.812,114.5 49.212,114.5 49.612,114.5 50.012,114.5 50.412,114.5 50.812,114.5 51.212,114.5 51.612,114.5 52.012,114.5 52.412,114.5 52.812,114.5 53.212,114.5 53.612,114.5 54.012,114.5 54.412,114.5 54.812,114.5 55.212,114.5 55.612,114.5 56.012,114.5 56.412,114.5 56.812,114.5 57.212,114.5 57.612,114.5 58.012,114.5 58.412,114.5 58.812,114.5 59.212,114.5 59.612,114.5 60.012,114.5 60.412,114.5 60.812,114.5 61.212,114.5 61.612,114.5 62.012,114.5 62.411,114.5 62.812,114.5 63.212,114.5 63.612,114.5 64.012,114.5 64.412,114.5 64.812,114.5 65.212,114.5 65.612,114.5 66.012,114.5 66.412,114.5 66.812,114.5 67.212,114.5 67.612,114.5 68.012,114.5 70.812,114.5 71.212,114.5 71.612,114.5 72.012,114.5 72.412,114.5 72.812,114.5 73.212,114.5 73.612,114.5 74.012,114.5 74.412,114.5 74.812,114.5 75.212,114.5 75.612,114.5 76.012,114.5 76.412,114.5 76.812,114.5 77.212,114.5 77.612,114.5 78.012,114.5 78.412,114.5 78.812,114.5 79.212,114.5 79.612,114.5 80.012,114.5 80.412,114.5 80.812,114.5 81.212,114.5 81.612,114.5 82.012,114.5 82.412,114.5 82.812,114.5 83.212,114.5 83.612,114.5 84.012,114.5 84.412,114.5 84.812,114.5 85.212,114.5 85.612,114.5 86.012,114.5 86.412,114.5 86.812,114.5 87.212,114.5 87.612,114.5 88.012,114.5 88.412,114.5 88.812,114.5 89.212,114.5 89.612,114.5 90.012,114.5 90.412,114.5 90.812,114.5 91.212,114.5 91.612,114.5 92.012,114.5 92.412,114.5 92.812,114.5 93.212,114.5 145.812,114.525 144.817,114.547 68.542,114.67 69.412,114.67 70.282,114.67 92.819,114.889 93.221,114.889 87.032,114.905 45.593,114.934 45.994,114.934 144.817,114.945 145.812,114.923 51.753,115.001 68.542,115.07 69.412,115.07 70.282,115.07 87.032,115.303 92.819,115.287 93.221,115.287 145.812,115.321 45.593,115.332 45.994,115.332 144.817,115.343 51.753,115.399 68.542,115.47 70.282,115.47 87.032,115.701 92.819,115.685 93.221,115.685 45.593,115.73 45.994,115.73 70.651,115.723 71.049,115.723 71.447,115.723 71.845,115.723 72.243,115.723 72.641,115.723 73.039,115.723 73.437,115.723 73.835,115.723 74.233,115.723 74.631,115.723 75.029,115.723 75.427,115.723 75.825,115.723 138.535,115.729 138.856,115.72 139.254,115.72 139.652,115.72 140.05,115.72 140.448,115.72 140.846,115.72 141.244,115.72 141.642,115.72 142.04,115.72 142.438,115.72 142.836,115.72 143.234,115.72 143.632,115.72 144.03,115.72 144.428,115.72 145.812,115.719 146.224,115.725 146.622,115.725 147.02,115.725 147.418,115.725 147.816,115.725 148.214,115.725 148.612,115.725 149.01,115.725 149.408,115.725 149.806,115.725 150.204,115.725 150.602,115.725 151,115.725 151.398,115.725 151.796,115.725 152.194,115.725 144.817,115.741 51.753,115.797 62.651,115.788 62.974,115.798 63.372,115.798 63.77,115.798 64.168,115.798 64.566,115.798 64.964,115.798 65.362,115.798 65.76,115.798 66.158,115.798 66.556,115.798 66.954,115.798 67.352,115.798 67.75,115.798 68.148,115.798 68.542,115.87 70.282,115.87 138.217,115.874 76.226,115.933 62.429,116.052 92.819,116.083 93.221,116.083 87.032,116.099 45.593,116.128 45.994,116.128 144.817,116.139 145.812,116.117 152.339,116.183 51.753,116.195 68.847,116.27 69.977,116.27 138.217,116.272 62.51,116.343 76.226,116.331 87.032,116.497 92.819,116.481 93.221,116.481 145.812,116.515 45.593,116.526 45.994,116.526 144.817,116.537 51.753,116.593 152.339,116.581 68.912,116.67 69.912,116.67 138.217,116.67 62.51,116.741 76.226,116.729 87.032,116.895 92.819,116.879 93.221,116.879 45.593,116.924 45.994,116.924 145.812,116.913 144.817,116.935 152.339,116.979 51.753,116.991 68.912,117.07 69.912,117.07 138.217,117.068 76.226,117.127 62.51,117.139 92.819,117.277 93.221,117.277 87.032,117.293 45.593,117.322 45.994,117.322 144.817,117.333 145.812,117.311 152.339,117.377 51.753,117.389 68.912,117.47 69.912,117.47 138.217,117.466 62.51,117.537 76.226,117.525 92.819,117.675 93.221,117.675 87.032,117.691 145.812,117.709 45.593,117.72 45.994,117.72 144.817,117.731 51.753,117.787 152.339,117.775 138.217,117.864 68.912,117.87 69.912,117.87 62.51,117.935 76.226,117.923 87.032,118.089 92.819,118.073 93.221,118.073 45.593,118.118 45.994,118.118 145.812,118.107 144.817,118.129 152.339,118.173 51.753,118.185 68.912,118.27 69.912,118.27 138.217,118.262 76.226,118.321 62.51,118.333 92.819,118.471 93.221,118.471 87.032,118.487 45.593,118.516 45.994,118.516 144.817,118.527 145.812,118.505 152.339,118.571 51.753,118.583 68.912,118.67 69.912,118.67 138.217,118.66 62.51,118.731 76.226,118.719 92.819,118.869 93.221,118.869 87.032,118.885 145.812,118.903 45.593,118.914 45.994,118.914 144.817,118.925 51.753,118.981 152.339,118.969 138.217,119.058 68.912,119.07 69.912,119.07 62.51,119.129 76.226,119.117 87.032,119.283 92.819,119.267 93.221,119.267 45.593,119.312 45.994,119.312 145.812,119.301 144.817,119.323 152.339,119.367 51.753,119.379 138.217,119.456 68.912,119.47 69.912,119.47 76.226,119.515 62.51,119.527 92.819,119.665 93.221,119.665 87.032,119.681 45.593,119.71 45.994,119.71 144.817,119.721 145.812,119.699 152.339,119.765 51.753,119.777 68.912,119.87 69.912,119.87 138.217,119.854 62.51,119.925 76.226,119.913 92.819,120.063 93.221,120.063 87.032,120.079 145.812,120.097 45.593,120.108 45.994,120.108 144.817,120.119 51.753,120.175 152.339,120.163 138.217,120.252 68.912,120.27 69.912,120.27 62.51,120.323 76.226,120.311 87.032,120.477 92.819,120.461 93.221,120.461 45.593,120.506 45.994,120.506 145.812,120.495 144.817,120.517 152.339,120.561 51.753,120.573 138.217,120.65 68.912,120.67 69.912,120.67 76.226,120.709 62.51,120.721 87.344,120.84 87.677,120.841 88.075,120.841 88.473,120.841 88.871,120.841 89.269,120.841 89.667,120.841 90.065,120.841 90.463,120.841 90.861,120.841 91.259,120.841 91.657,120.841 92.055,120.841 92.453,120.841 92.819,120.859 93.221,120.859 87.032,120.875 45.593,120.904 45.994,120.904 46.356,120.892 46.754,120.892 47.152,120.892 47.55,120.892 47.948,120.892 48.346,120.892 48.744,120.892 49.142,120.892 49.54,120.892 49.938,120.892 50.336,120.892 50.734,120.892 51.132,120.892 51.53,120.892 144.817,120.915 145.812,120.893 152.339,120.959 138.217,121.048 68.912,121.07 69.912,121.07 62.51,121.119 76.226,121.107 145.812,121.291 144.817,121.313 146.192,121.301 146.59,121.301 146.988,121.301 147.386,121.301 147.784,121.301 148.182,121.301 148.58,121.301 148.978,121.301 149.376,121.301 149.774,121.301 150.172,121.301 150.57,121.301 150.968,121.301 151.366,121.301 151.764,121.301 152.162,121.301 138.47,121.349 138.868,121.349 139.266,121.349 139.664,121.349 140.062,121.349 140.46,121.349 140.858,121.349 141.256,121.349 141.654,121.349 142.052,121.349 142.45,121.349 142.848,121.349 143.246,121.349 143.644,121.349 144.042,121.349 144.44,121.349 62.953,121.473 68.912,121.47 69.912,121.47 62.523,121.483 63.343,121.483 63.741,121.483 64.139,121.483 64.537,121.483 64.935,121.483 65.333,121.483 65.731,121.483 66.129,121.483 66.527,121.483 66.925,121.483 67.323,121.483 67.721,121.483 68.119,121.483 68.517,121.483 70.279,121.477 70.677,121.477 71.075,121.477 71.473,121.477 71.871,121.477 72.269,121.477 72.667,121.477 73.065,121.477 73.463,121.477 73.861,121.477 74.259,121.477 74.657,121.477 75.055,121.477 75.453,121.477 75.826,121.485 76.238,121.492 145.812,121.689 146.186,121.694 146.584,121.694 146.982,121.694 147.38,121.694 147.778,121.694 148.176,121.694 148.574,121.694 148.972,121.694 149.37,121.694 149.768,121.694 150.166,121.694 150.564,121.694 150.962,121.694 151.36,121.694 151.758,121.694 152.156,121.694 138.471,121.714 138.869,121.714 139.267,121.714 139.665,121.714 140.063,121.714 140.461,121.714 140.859,121.714 141.257,121.714 141.655,121.714 142.053,121.714 142.451,121.714 142.849,121.714 143.247,121.714 143.645,121.714 144.043,121.714 144.441,121.714 144.817,121.712 62.939,121.856 62.509,121.866 63.329,121.866 63.727,121.866 64.125,121.866 64.523,121.866 64.921,121.866 65.319,121.866 65.717,121.866 66.115,121.866 66.513,121.866 66.911,121.866 67.309,121.866 67.707,121.866 68.105,121.866 68.503,121.866 68.912,121.87 69.911,121.87 70.279,121.861 70.677,121.861 71.075,121.861 71.473,121.861 71.871,121.861 72.269,121.861 72.667,121.861 73.065,121.861 73.463,121.861 73.861,121.861 74.259,121.861 74.657,121.861 75.055,121.861 75.453,121.861 75.812,121.868 76.224,121.875
  other v2: 140.576,74.676 150.076,74.676 37.49,75.87 46.99,75.87 89.313,75.87 98.813,75.87 37.49,87.427 46.99,87.427 89.313,87.427 98.813,87.427 63.894,87.49 73.394,87.49 123.19,92.253 167.551,92.265 123.19,101.753 167.551,101.765 48.184,109.245 90.589,109.245 48.184,118.745 90.589,118.745 140.576,119.304 150.076,119.304 64.656,119.355 74.156,119.355
  other v3: 42.248,74.143 94.055,74.143 42.244,81.683 94.057,81.676 68.232,82.091 69.05,82.087 42.246,82.498 94.062,82.503 42.245,89.098 94.058,89.103 68.642,89.169 46.368,114 68.992,113.997 69.822,114 92.431,114 69.412,121.079

## Other copper
Layer 5:
  rectangle: 45.412,104.978 93.412,122.161
  rectangle: 33.491,73.127 102.634,90.28
  rectangle: 120.312,71.988 170.312,121.988
Layer 3:
  rectangle: 45.412,104.978 93.412,122.161
  rectangle: 33.491,73.127 102.634,90.28
  rectangle: 120.312,71.988 170.312,121.988
Layer 1:
  rectangle: 45.412,104.978 93.412,122.161
  rectangle: 33.491,73.127 102.634,90.28
  rectangle: 120.312,71.988 170.312,121.988
Layer 2:
  rectangle: 45.412,104.978 93.412,122.161
  rectangle: 33.491,73.127 102.634,90.28
  rectangle: 120.312,96.673 120.912,97.313
  rectangle: 120.312,71.988 120.942,96.676
  rectangle: 169.711,96.674 170.312,97.301
  rectangle: 120.913,71.988 170.312,96.674
  rectangle: 169.659,97.3 170.312,121.988
  rectangle: 120.912,97.3 169.713,121.988
  rectangle: 120.312,97.303 120.942,121.988
Layer 4:
  rectangle: 45.412,104.978 93.412,122.161
  rectangle: 33.528,73.185 102.692,90.134
  rectangle: 102.575,73.185 102.692,90.251
  rectangle: 120.312,71.988 170.312,121.988